# EAGLE board esquema_gps (EAGLE 5.11)
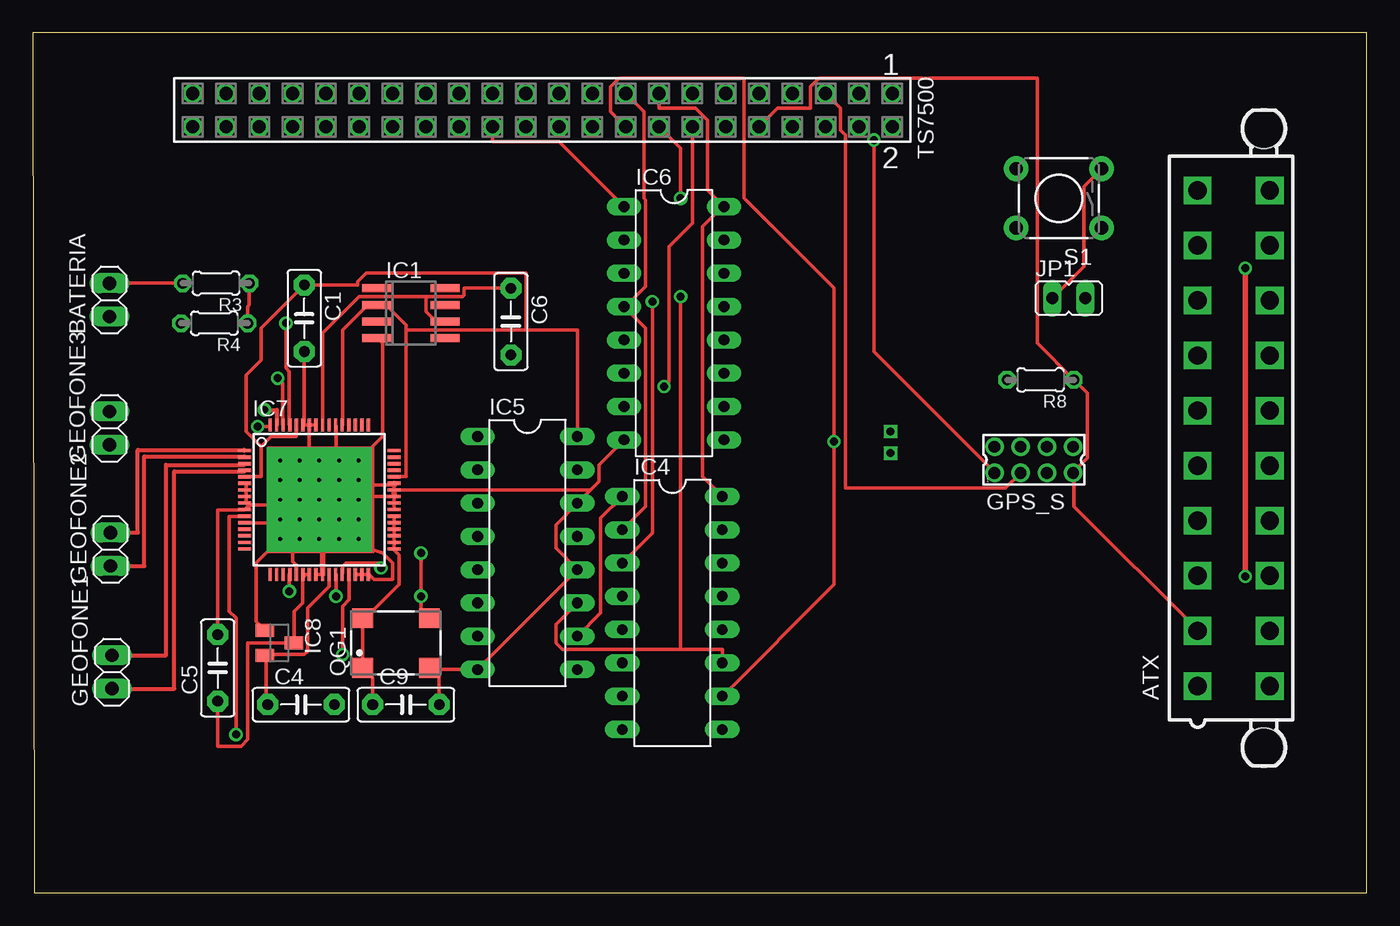
[diagram p0: board, top side]
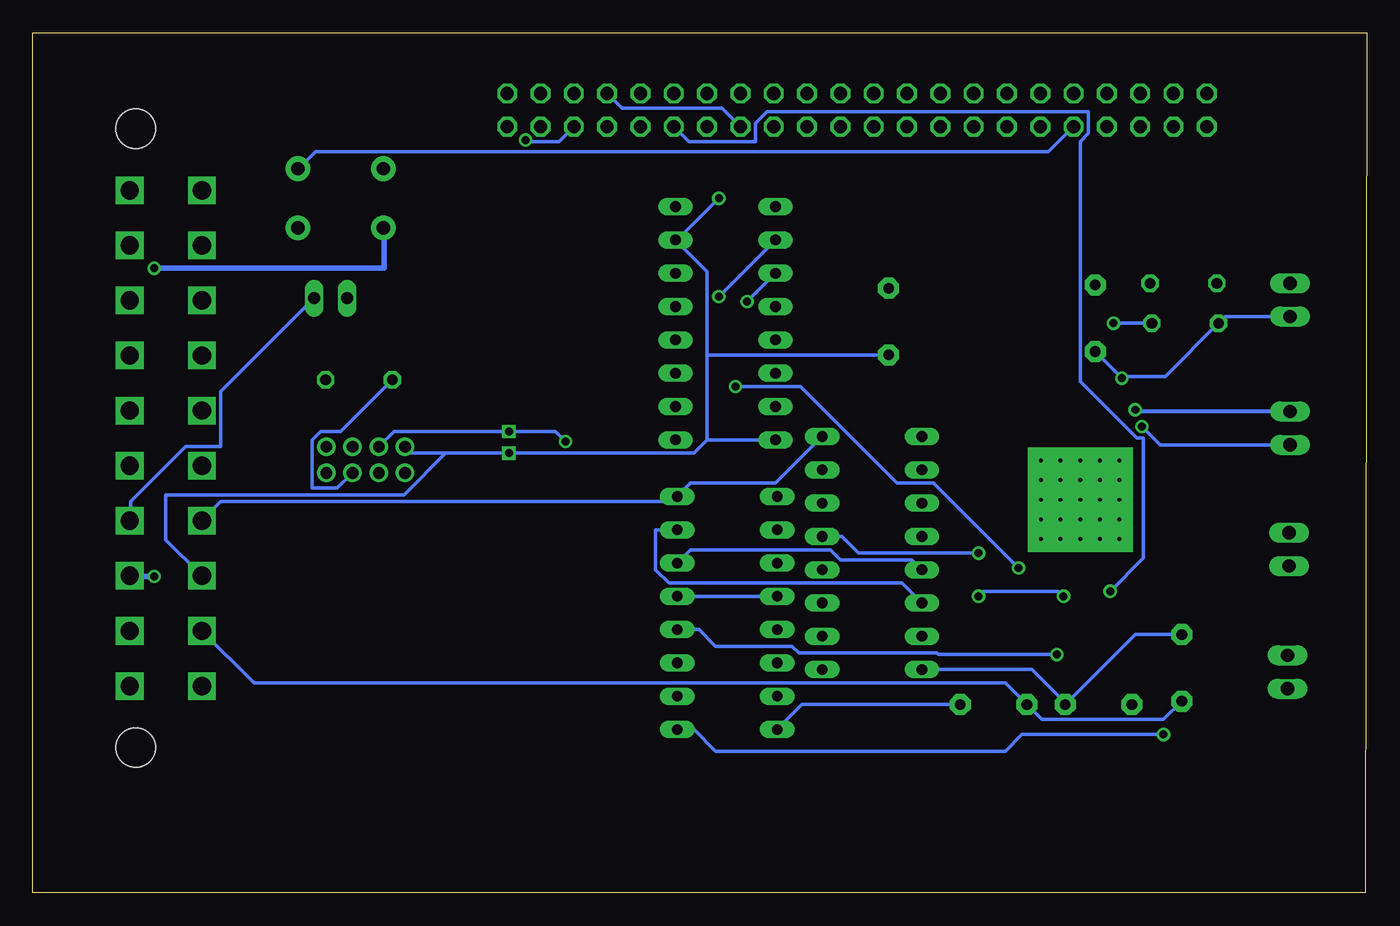
[diagram p1: board, bottom side, seen from below]

Size 101.71 x 65.58 mm. Coordinates in mm from the lower left corner, seen from the top.
Outline: 0.13,0 101.71,0 101.71,65.58 0,65.58 0.13,0
Copper layers (1*16): Top 0.035mm / dielectric 1.5mm / Bottom 0.035mm
Design rules "default": minimum track width 10mil, minimum drill 24mil, track to track 8mil, track to pad 8mil, pad to pad 8mil, via to via 8mil, smd to smd 8mil, copper to edge 40mil, drill to drill 8mil, minimum pad ring 10mil, minimum via ring 8mil, stop-mask expansion 4mil, vias tented up to drill 0mil, thermal gap 10mil

## Footprints (pad centres in the part's own frame; a part is rotated, then mirrored left to right if it is on the bottom)
5566-20 = drill 1.4 square: 1 18.9,-2.75; 2 14.7,-2.75; 3 10.5,-2.75; 4 6.3,-2.75; 5 2.1,-2.75; 6 -2.1,-2.75; 7 -6.3,-2.75; 8 -10.5,-2.75; 9 -14.7,-2.75; 10 -18.9,-2.75; 11 18.9,2.75; 12 14.7,2.75; 13 10.5,2.75; 14 6.3,2.75; 15 2.1,2.75; 16 -2.1,2.75; 17 -6.3,2.75; 18 -10.5,2.75; 19 -14.7,2.75; 20 -18.9,2.75 | hole 3: 23.6,2.29; -23.6,2.29
1X02 = drill 1.016 long: 1 -1.27,0; 2 1.27,0
C5B2.5 = drill 0.813 pad 1.6 octagon: 1 -2.54,0; 2 2.54,0
87758-0816 = drill 0.9 pad 1.27 round: 1 -3,-1; 2 -3,1; 3 -1,-1; 4 -1,1; 5 1,-1; 6 1,1; 7 3,-1; 8 3,1
SO08 = smd 0.6 x 2.2: 1 -1.905,-2.6; 2 -0.635,-2.6; 3 0.635,-2.6; 4 1.905,-2.6; 5 1.905,2.6; 6 0.635,2.6; 7 -0.635,2.6; 8 -1.905,2.6
DIL16 = drill 0.813 long: 1 -8.89,-3.81; 2 -6.35,-3.81; 3 -3.81,-3.81; 4 -1.27,-3.81; 5 1.27,-3.81; 6 3.81,-3.81; 7 6.35,-3.81; 8 8.89,-3.81; 9 8.89,3.81; 10 6.35,3.81; 11 3.81,3.81; 12 1.27,3.81; 13 -1.27,3.81; 14 -3.81,3.81; 15 -6.35,3.81; 16 -8.89,3.81
HTQFP-64-PAP = smd 1 x 0.25: 1 -5.7,3.75; 2 -5.7,3.25; 3 -5.7,2.75; 4 -5.7,2.25; 5 -5.7,1.75; 6 -5.7,1.25; 7 -5.7,0.75; 8 -5.7,0.25; 9 -5.7,-0.25; 10 -5.7,-0.75; 11 -5.7,-1.25; 12 -5.7,-1.75; 13 -5.7,-2.25; 14 -5.7,-2.75; 15 -5.7,-3.25; 16 -5.7,-3.75; 33 5.7,-3.75; 34 5.7,-3.25; 35 5.7,-2.75; 36 5.7,-2.25; 37 5.7,-1.75; 38 5.7,-1.25; 39 5.7,-0.75; 40 5.7,-0.25; 41 5.7,0.25; 42 5.7,0.75; 43 5.7,1.25; 44 5.7,1.75; 45 5.7,2.25; 46 5.7,2.75; 47 5.7,3.25; 48 5.7,3.75 | smd 0.25 x 1: 17 -3.75,-5.7; 18 -3.25,-5.7; 19 -2.75,-5.7; 20 -2.25,-5.7; 21 -1.75,-5.7; 22 -1.25,-5.7; 23 -0.75,-5.7; 24 -0.25,-5.7; 25 0.25,-5.7; 26 0.75,-5.7; 27 1.25,-5.7; 28 1.75,-5.7; 29 2.25,-5.7; 30 2.75,-5.7; 31 3.25,-5.7; 32 3.75,-5.7; 49 3.75,5.7; 50 3.25,5.7; 51 2.75,5.7; 52 2.25,5.7; 53 1.75,5.7; 54 1.25,5.7; 55 0.75,5.7; 56 0.25,5.7; 57 -0.25,5.7; 58 -0.75,5.7; 59 -1.25,5.7; 60 -1.75,5.7; 61 -2.25,5.7; 62 -2.75,5.7; 63 -3.25,5.7; 64 -3.75,5.7 | drill 0.3 pad 2 square: EXP1 -3,3; EXP2 -1.5,3; EXP3 0,3; EXP4 1.5,3; EXP5 3,3; EXP6 -3,1.5; EXP7 -1.5,1.5; EXP8 0,1.5; EXP9 1.5,1.5; EXP10 3,1.5; EXP11 -3,0; EXP12 -1.5,0; EXP13 0,0; EXP14 1.5,0; EXP15 3,0; EXP16 -3,-1.5; EXP17 -1.5,-1.5; EXP18 0,-1.5; EXP19 1.5,-1.5; EXP20 3,-1.5; EXP21 -3,-3; EXP22 -1.5,-3; EXP23 0,-3; EXP24 1.5,-3; EXP25 3,-3
SOT23 = smd 1 x 1.4: 1 -0.95,-1.1; 2 0.95,-1.1; 3 0,1.1
JP1 = drill 0.914 long: 1 0,-1.27; 2 0,1.27
SM77H = smd 1.6 x 1.5: 1 -2.55,-1.9; 2 2.55,-1.9; 3 2.55,1.9; 4 -2.55,1.9
0204/5 = drill 0.813 octagon: 1 -2.54,0; 2 2.54,0
TACTILE-PTH = drill 1.016 pad 1.88 round: 1 -3.251,2.261; 2 3.251,2.261; 3 -3.251,-2.261; 4 3.251,-2.261
SSW-122-02-S-D = drill 1 pad 1.5 octagon: 1 -26.67,-1.27; 2 -26.67,1.27; 3 -24.13,-1.27; 4 -24.13,1.27; 5 -21.59,-1.27; 6 -21.59,1.27; 7 -19.05,-1.27; 8 -19.05,1.27; 9 -16.51,-1.27; 10 -16.51,1.27; 11 -13.97,-1.27; 12 -13.97,1.27; 13 -11.43,-1.27; 14 -11.43,1.27; 15 -8.89,-1.27; 16 -8.89,1.27; 17 -6.35,-1.27; 18 -6.35,1.27; 19 -3.81,-1.27; 20 -3.81,1.27; 21 -1.27,-1.27; 22 -1.27,1.27; 23 1.27,-1.27; 24 1.27,1.27; 25 3.81,-1.27; 26 3.81,1.27; 27 6.35,-1.27; 28 6.35,1.27; 29 8.89,-1.27; 30 8.89,1.27; 31 11.43,-1.27; 32 11.43,1.27; 33 13.97,-1.27; 34 13.97,1.27; 35 16.51,-1.27; 36 16.51,1.27; 37 19.05,-1.27; 38 19.05,1.27; 39 21.59,-1.27; 40 21.59,1.27; 41 24.13,-1.27; 42 24.13,1.27; 43 26.67,-1.27; 44 26.67,1.27

## Placement (x,y rotation side)
ATX  5566-20  [5566-20]  91.57,34.67 270 top
BATERIA  [1X02]  5.84,45.21 90 top
C1  1uF  [C5B2.5]  20.7,43.81 270 top
C4  10uF  [C5B2.5]  20.45,14.35 0 top
C5  10uF  [C5B2.5]  14.1,17.14 90 top
C6  10uF  [C5B2.5]  36.45,43.56 270 top
C9  0.1uF  [C5B2.5]  28.45,14.35 0 top
GEOFONE1  [1X02]  6.04,16.83 90 top
GEOFONE2  [1X02]  5.93,26.19 90 top
GEOFONE3  [1X02]  5.84,35.43 90 top
GPS_S  87758-0816  [87758-0816]  76.33,33.02 0 top
IC1  REF02D  [SO08]  28.83,44.2 270 top
IC4  4572N  [DIL16]  48.77,21.34 270 top
IC5  74AC590N  [DIL16]  37.72,25.91 270 top
IC6  74LS157N  [DIL16]  48.9,43.43 270 top
IC7  ADS1278  [HTQFP-64-PAP]  21.84,29.97 0 top
IC8  [SOT23]  18.8,19.05 270 top
JP1  [JP1]  78.99,45.34 270 top
QG1  SM77H  [SM77H]  27.69,19.05 0 top
R3  5k  [0204/5]  13.97,46.48 180 top
R4  1k  [0204/5]  13.84,43.43 180 top
R8  100k  [0204/5]  76.83,39.12 180 top
S1  SWITCH-MOMENTARY-2PTH  [TACTILE-PTH]  78.23,52.96 180 top
TS7500  SSW-122-02-S-D  [SSW-122-02-S-D]  38.86,59.69 180 top

## Library data of the parts
ATX = con-molex; OC_FARNELL: unknown; OC_NEWARK: unknown
BATERIA GEOFONE1-GEOFONE3 = pinhead
C1 C4-C6 C9 = capacitor-wima
GPS_S = con-molex; MF: MOLEX; MPN: 87758-0816; OC_FARNELL: 7472331; OC_NEWARK: 59J1556
IC1 = linear
IC4 = 45xx
IC5 IC6 = 74xx-eu
IC7 = texas; MPN: ADS1278IPAPT; OC_FARNELL: 1603419; OC_NEWARK: 50M8811
IC8 = v-reg
JP1 = jumper
QG1 = crystal; OC_FARNELL: unknown; OC_NEWARK: unknown
R3 R4 = rcl
R8 = resistor
S1 = SparkFun
TS7500 = con-samtec; MPN: SSW-122-02-S-D; OC_FARNELL: unknown; OC_NEWARK: 11P9673

## Nets
2.5V: C6.1 IC1.6 IC7.56
+1V8: C4.1 IC7.26 IC8.2
+3V3: ATX.2 C5.1 C9.1 GPS_S.7 IC7.22 IC7.23 IC7.33 IC7.34 IC7.35 IC7.36 IC7.37 IC7.38 IC8.3 QG1.1 QG1.4 R8.1 TS7500.10
+5V: ATX.4 C1.1 IC1.2 IC4.16 IC5.16 IC6.16 IC7.5 IC7.44 IC7.53 IC7.60 TS7500.15
ADC_DATA: IC7.20 TS7500.12
CONT_144: IC4.3 IC6.3
CONT_RST: IC4.1 IC5.10
DR_INT: IC4.2 IC6.4 TS7500.17
FIRST_ADC_INT: IC4.11 IC5.11 IC6.2
GND: ATX.3 BATERIA.1 C1.2 C4.2 C5.2 C6.2 C9.2 GPS_S.2 IC1.4 IC4.8 IC5.8 IC5.12 IC5.14 IC6.8 IC6.15 IC7.6 IC7.7 IC7.8 IC7.9 IC7.10 IC7.12 IC7.21 IC7.24 IC7.25 IC7.30 IC7.31 IC7.32 IC7.39 IC7.40 IC7.41 IC7.42 IC7.43 IC7.54 IC7.57 IC7.58 IC7.59 IC7.62 IC8.1 QG1.2 R4.2 TS7500.7 TS7500.16
GPS_PPS: GPS_S.4 IC4.10 TS7500.18
N$1: IC6.1 TS7500.26
N$2: IC4.15 IC5.6
N$3: IC4.14 IC5.5
N$4: IC4.9 IC7.11
N$5: IC4.4 IC4.13
N$6: JP1.1 S1.3 TS7500.36
N$7: IC4.12 IC7.29
N$8: GEOFONE1.2 IC7.3
N$9: ATX.14 JP1.2
N$10: GEOFONE1.1 IC7.4
N$11: GEOFONE2.2 IC7.1
N$12: IC7.61 R3.1 R4.1
N$13: ATX.13
N$14: GEOFONE3.2 IC7.63
N$15: GEOFONE3.1 IC7.64
N$17: IC5.13 IC7.27 QG1.3
N$19: BATERIA.2 R3.2
N$42: GPS_S.1 TS7500.6
N$43: GPS_S.3 TS7500.5
N$44: GPS_S.5 R8.2
N$46: GEOFONE2.1 IC7.2
SPI_CLOCK: IC7.28 TS7500.14

## Tracks (layer width: path | path; a pad name or v marks a point on that pad's centre or on a via)
2.5V
  Top 0.254: 29.97,45.47 24.89,45.47 22.1,42.67 22.1,35.69 IC7.56 | 29.97,45.47 29.97,44.32 30.73,43.56 IC1.6 | C6.1 32.89,46.1 32.89,45.59 32.77,45.47 29.97,45.47
+1V8
  Top 0.254: IC7.26 22.61,24.26 22.61,23.37 20.95,21.72 20.95,18.41 20.7,18.16 17.78,18.16 IC8.2 17.78,18.03 17.78,14.48 C4.1
+3V3
  Top 0.254: IC7.23 21.08,24.26 20.7,24.26 IC7.22 20.7,24.13 20.57,24 20.57,22.1 19.94,21.46 19.94,19.05 IC8.3 16.38,19.05 16.38,11.68 15.88,11.18 14.1,11.18 C5.1 | IC7.38 27.56,28.7 27.56,28.32 IC7.37 27.56,28.19 27.56,27.81 IC7.36 27.56,27.69 27.56,27.3 IC7.35 27.56,27.18 27.56,26.8 IC7.34 27.56,26.67 27.56,26.29 IC7.33 27.56,26.16 27.94,25.78 27.94,23.5 25.27,20.83 QG1.4 25.15,20.83 25.15,17.27 QG1.1 25.91,16.38 C9.1 | TS7500.10 56.77,59.82 59.31,59.82 59.31,61.47 59.94,62.1 76.58,62.1 76.58,41.91 R8.1 80.39,38.1 80.39,33.15 79.38,32.13 GPS_S.7 79.38,32 79.38,29.46 88.77,20.07 ATX.2
  Bottom 0.254: C5.1 15.49,13.21 24.77,13.21 C9.1 27.56,16 84.84,16 88.77,19.94 ATX.2
+5V
  Top 0.254: 17.4,34.04 17.4,31.75 16.26,31.75 IC7.5 | 17.4,34.04 18.16,34.8 20.07,34.8 20.07,35.56 IC7.60 | 17.4,34.04 16.26,35.18 16.26,39.5 17.4,40.64 17.4,43.05 C1.1 24.77,46.35 24.77,46.61 25.4,47.24 37.59,47.24 37.59,42.93 | TS7500.15 47.75,59.82 50.55,59.82 51.44,58.93 51.44,53.59 IC6.16 52.58,52.32 51.05,50.8 51.05,31.75 IC4.16 | 28.45,42.93 28.45,43.31 26.92,44.83 IC1.2 25.53,44.83 23.62,42.93 23.62,35.69 IC7.53 | 28.45,42.93 28.45,31.75 27.56,31.75 IC7.44 | 37.59,42.93 41.53,42.93 IC5.16 | 37.59,42.93 28.45,42.93
  Bottom 0.254: IC5.16 45.09,31.24 51.56,31.24 IC4.16 52.96,29.84 87.38,29.84 88.77,28.45 ATX.4
ADC_DATA  (via drill 0.61)
  Top 0.254: v19.56,22.99 19.56,24.26 IC7.20
  Bottom 0.254: v19.56,22.99 17.02,25.53 17.02,34.67 17.53,34.67 21.84,38.99 21.84,57.28 21.21,57.91 21.21,59.56 45.72,59.56 46.61,58.67 46.61,57.28 51.69,57.28 TS7500.12
CONT_144  (via drill 0.61)
  Top 0.254: IC4.3 47.24,27.43 v47.24,45.09
  Bottom 0.254: v47.24,45.09 IC6.3
CONT_RST
  Top 0.254: IC5.10 43.31,21.34 43.31,28.58 IC4.1
DR_INT
  Top 0.254: IC4.2 46.74,29.46 46.74,43.05 IC6.4 45.21,44.7 46.74,46.23 46.74,52.83 46.61,52.96 46.61,59.56 TS7500.17
FIRST_ADC_INT  (via drill 0.61)
  Top 0.254: IC5.11 39.88,20.45 39.88,19.05 40.39,18.54 49.4,18.54 | 49.4,18.54 52.58,18.54 IC4.11 | 49.4,18.54 v49.4,45.47
  Bottom 0.254: v49.4,45.47 IC6.2
GND  (via drill 0.61)
  Top 0.254: 24.77,26.54 26.67,25.91 27.43,25.15 27.43,23.88 26.04,23.88 25.65,24.26 IC7.32 25.53,24.26 25.15,24.26 IC7.31 25.02,24.26 24.64,24.26 IC7.30 | IC7.39 27.56,29.34 27.56,29.72 IC7.40 27.56,29.84 27.56,30.1 IC7.41 27.56,30.23 | TS7500.16 49.4,56.77 v49.4,52.96 | IC1.4 26.29,42.29 26.67,41.91 26.67,34.8 25.15,33.27 | IC7.54 23.11,35.56 23.11,33.4 23.11,33.27 21.08,33.27 IC7.58 IC7.57 21.59,35.69 21.21,35.69 IC7.58 21.08,35.69 20.7,35.69 IC7.59 20.7,35.81 C1.2 | IC7.43 27.56,31.12 27.56,30.73 IC7.42 | IC7.25 21.97,24.26 21.72,24.26 IC7.24 21.59,24.38 | IC7.6 16.26,31.12 16.26,30.73 IC7.7 16.26,30.61 16.26,30.23 IC7.8 16.26,30.1 16.26,29.84 IC7.9 16.26,29.72 16.45,29.53 16.26,29.34 IC7.10 16.13,29.21 14.1,29.21 C5.2 | IC7.42 27.56,30.61 | IC6.8 43.18,32.64 43.18,31.37 42.48,30.67 | IC7.42 27.69,30.73 42.42,30.73 42.48,30.67 | IC7.21 20.07,24.38 20.07,24.89 20.13,24.96 19.81,25.27 19.81,26.42 18.29,26.42 17.02,25.15 17.02,20.68 IC8.1 17.65,20.07 17.02,20.7 | 42.48,30.67 IC5.14 39.88,28.07 39.88,26.29 IC5.12 41.4,24.64 41.4,24.51 IC5.8 30.61,17.02 QG1.2 30.35,17.14 30.99,16.51 C9.2 | IC7.12 16.26,28.19 18.67,28.19 | 16.45,29.59 18.67,29.59 | 27.54,31.12 25.02,31.12 25.02,30.86 25.27,30.61 | IC7.41 25.65,30.23 25.27,30.61 | 25.27,30.61 25.27,30.73 24.89,31.12 25.02,31.24 | IC7.62 19.05,35.69 19.05,38.86 v18.67,39.24
  Top 0.406: 27.56,30.23 IC7.41 IC7.42 | 23.11,33.4 25.02,33.4 25.15,33.27 25.02,33.27 25.02,31.24 25.02,31.12 | IC7.43 27.54,31.12 | 22.09,26.54 IC7.25 | 22.1,26.54 22.09,26.54 | 22.1,26.54 24.77,26.54 | 16.45,29.53 16.45,29.59 | 18.67,29.59 18.67,28.19 22.1,28.19 22.1,26.54 | 19.81,26.42 19.81,26.54 22.09,26.54
  Bottom 0.254: TS7500.7 56.77,59.82 49.15,59.82 TS7500.16 | ATX.3 88.9,24.26 91.57,26.92 91.57,30.35 73.41,30.35 70.23,33.53 | GPS_S.2 73.28,33.91 72.9,33.53 70.23,33.53 | v49.4,52.96 52.58,49.78 IC6.15 50.29,47.37 50.29,41.02 | 70.23,33.53 v65.41,33.53 51.31,33.53 50.29,34.54 | 50.29,41.02 C6.2 | 50.29,34.54 50.29,41.02 | IC6.8 50.29,34.54 | IC4.8 43.05,14.35 C9.2 | IC5.8 25.53,17.02 22.99,14.48 C4.2 17.65,19.69 C5.2 | C1.2 v18.67,39.24 18.67,39.37 15.37,39.37 R4.2 10.79,43.94 BATERIA.1
GPS_PPS  (via drill 0.61)
  Top 0.254: IC4.10 61.09,23.5 v61.09,34.42 61.09,46.1 54.23,52.96 54.23,62.1 44.7,62.1 44.07,61.47 44.07,59.56 TS7500.18
  Bottom 0.254: v61.09,34.42 61.85,35.18 v65.41,35.18 74.17,35.18 GPS_S.4
N$1
  Top 0.254: IC6.1 40.13,57.28 35.05,57.28 TS7500.26
N$2
  Bottom 0.254: IC5.6 35.43,23.62 53.21,23.62 54.23,24.64 54.23,27.69 IC4.15
N$3
  Bottom 0.254: IC5.5 34.67,25.4 40.13,25.4 40.89,26.16 51.56,26.16 IC4.14
N$4  (via drill 0.61)
  Top 0.254: v15.49,12.06 15.49,20.95 14.99,21.46 14.99,28.7 16.13,28.7 IC7.11
  Bottom 0.254: v15.49,12.06 26.29,12.06 27.56,10.79 49.66,10.79 51.31,12.45 IC4.9
N$5
  Bottom 0.254: IC4.4 IC4.13
N$6
  Top 0.254: JP1.1 80.14,47.75 80.14,53.85 81.41,55.12 S1.3
  Bottom 0.254: TS7500.36 24.26,56.52 80.14,56.52 81.41,55.24 S1.3
N$7  (via drill 0.61)
  Top 0.254: v23.62,18.16 23.62,21.84 24.13,22.35 24.13,24.26 IC7.29
  Bottom 0.254: v23.62,18.16 32.64,18.16 32.77,18.29 43.31,18.29 43.81,18.8 49.66,18.8 50.93,20.07 IC4.12
N$8
  Top 0.305: GEOFONE1.2 10.16,18.1 10.16,32.64 16.14,32.64 IC7.3
N$9
  Bottom 0.254: JP1.2 87.38,38.23 87.38,34.04 90.04,34.04 94.23,29.84 94.23,28.45 ATX.14
N$10
  Top 0.305: GEOFONE1.1 10.79,15.56 10.79,32.13 16.14,32.13 IC7.4
N$11
  Top 0.305: GEOFONE2.2 8,27.46 8,33.78 16.14,33.78 IC7.1
N$12  (via drill 0.61)
  Top 0.254: v19.3,43.43 19.3,40.01 19.56,39.75 19.56,35.69 IC7.61 | R3.1 16.51,44.83 16.38,44.7 R4.1
  Bottom 0.254: v19.3,43.43 R4.1
N$13  (via drill 0.6)
  Top 0.406: v92.46,24.13 v92.46,47.62
  Bottom 0.406: 74.93,50.55 74.93,47.62 v92.46,47.62 | ATX.13 94.23,24.13 v92.46,24.13
N$14  (via drill 0.6)
  Top 0.305: v17.65,36.83 18.59,36.83 IC7.63
  Bottom 0.305: v17.65,36.83 17.53,36.7 GEOFONE3.2
N$15  (via drill 0.61)
  Top 0.254: v17.14,35.56 18.03,35.56 IC7.64
  Bottom 0.254: v17.14,35.56 15.75,34.16 GEOFONE3.1
N$17  (via drill 0.61)
  Top 0.254: v29.59,25.91 v29.59,22.61 29.59,20.95 30.23,20.95 QG1.3 | v23.11,22.61 23.11,24.26 IC7.27
  Bottom 0.254: v29.59,25.91 38.73,25.91 40.01,27.18 IC5.13 | v23.11,22.61 23.5,22.99 29.21,22.99 v29.59,22.61
N$19
  Top 0.254: BATERIA.2 R3.2
N$42  (via drill 0.61)
  Top 0.254: v64.14,57.4 64.14,41.27 73.28,32.13 GPS_S.1
  Bottom 0.254: v64.14,57.4 64.01,57.28 61.59,57.28 TS7500.6
N$43
  Top 0.254: TS7500.5 61.59,59.82 61.59,58.17 61.98,57.78 61.98,30.86 74.17,30.86 GPS_S.3
N$44
  Bottom 0.254: R8.2 78.23,35.18 79.76,35.18 80.39,34.54 80.39,30.86 78.49,30.86 GPS_S.5
N$46
  Top 0.305: GEOFONE2.1 8.51,24.92 8.51,33.27 16.14,33.27 IC7.2
SPI_CLOCK  (via drill 0.61)
  Top 0.254: v26.54,24.77 26.54,25.15 23.88,25.15 23.62,24.89 23.62,24.38 IC7.28 | v48.13,38.61 48.51,38.99 48.51,49.28 50.29,51.05 TS7500.14
  Bottom 0.254: v26.54,24.77 33.02,31.24 35.81,31.24 43.18,38.61 v48.13,38.61
(copper drawn outside any net)
  shapes: Top area x1